# Altium PCB TK532_Kondensatorkort.PcbDoc
Units mm, origin at the board's own origin, x right, y up, seen from the top; angles counter-clockwise.
Board outline 80.3 x 75 mm, 2 copper layers (Top Layer, Bottom Layer); 5 components, 6 nets, 52 pads, 52 vias.
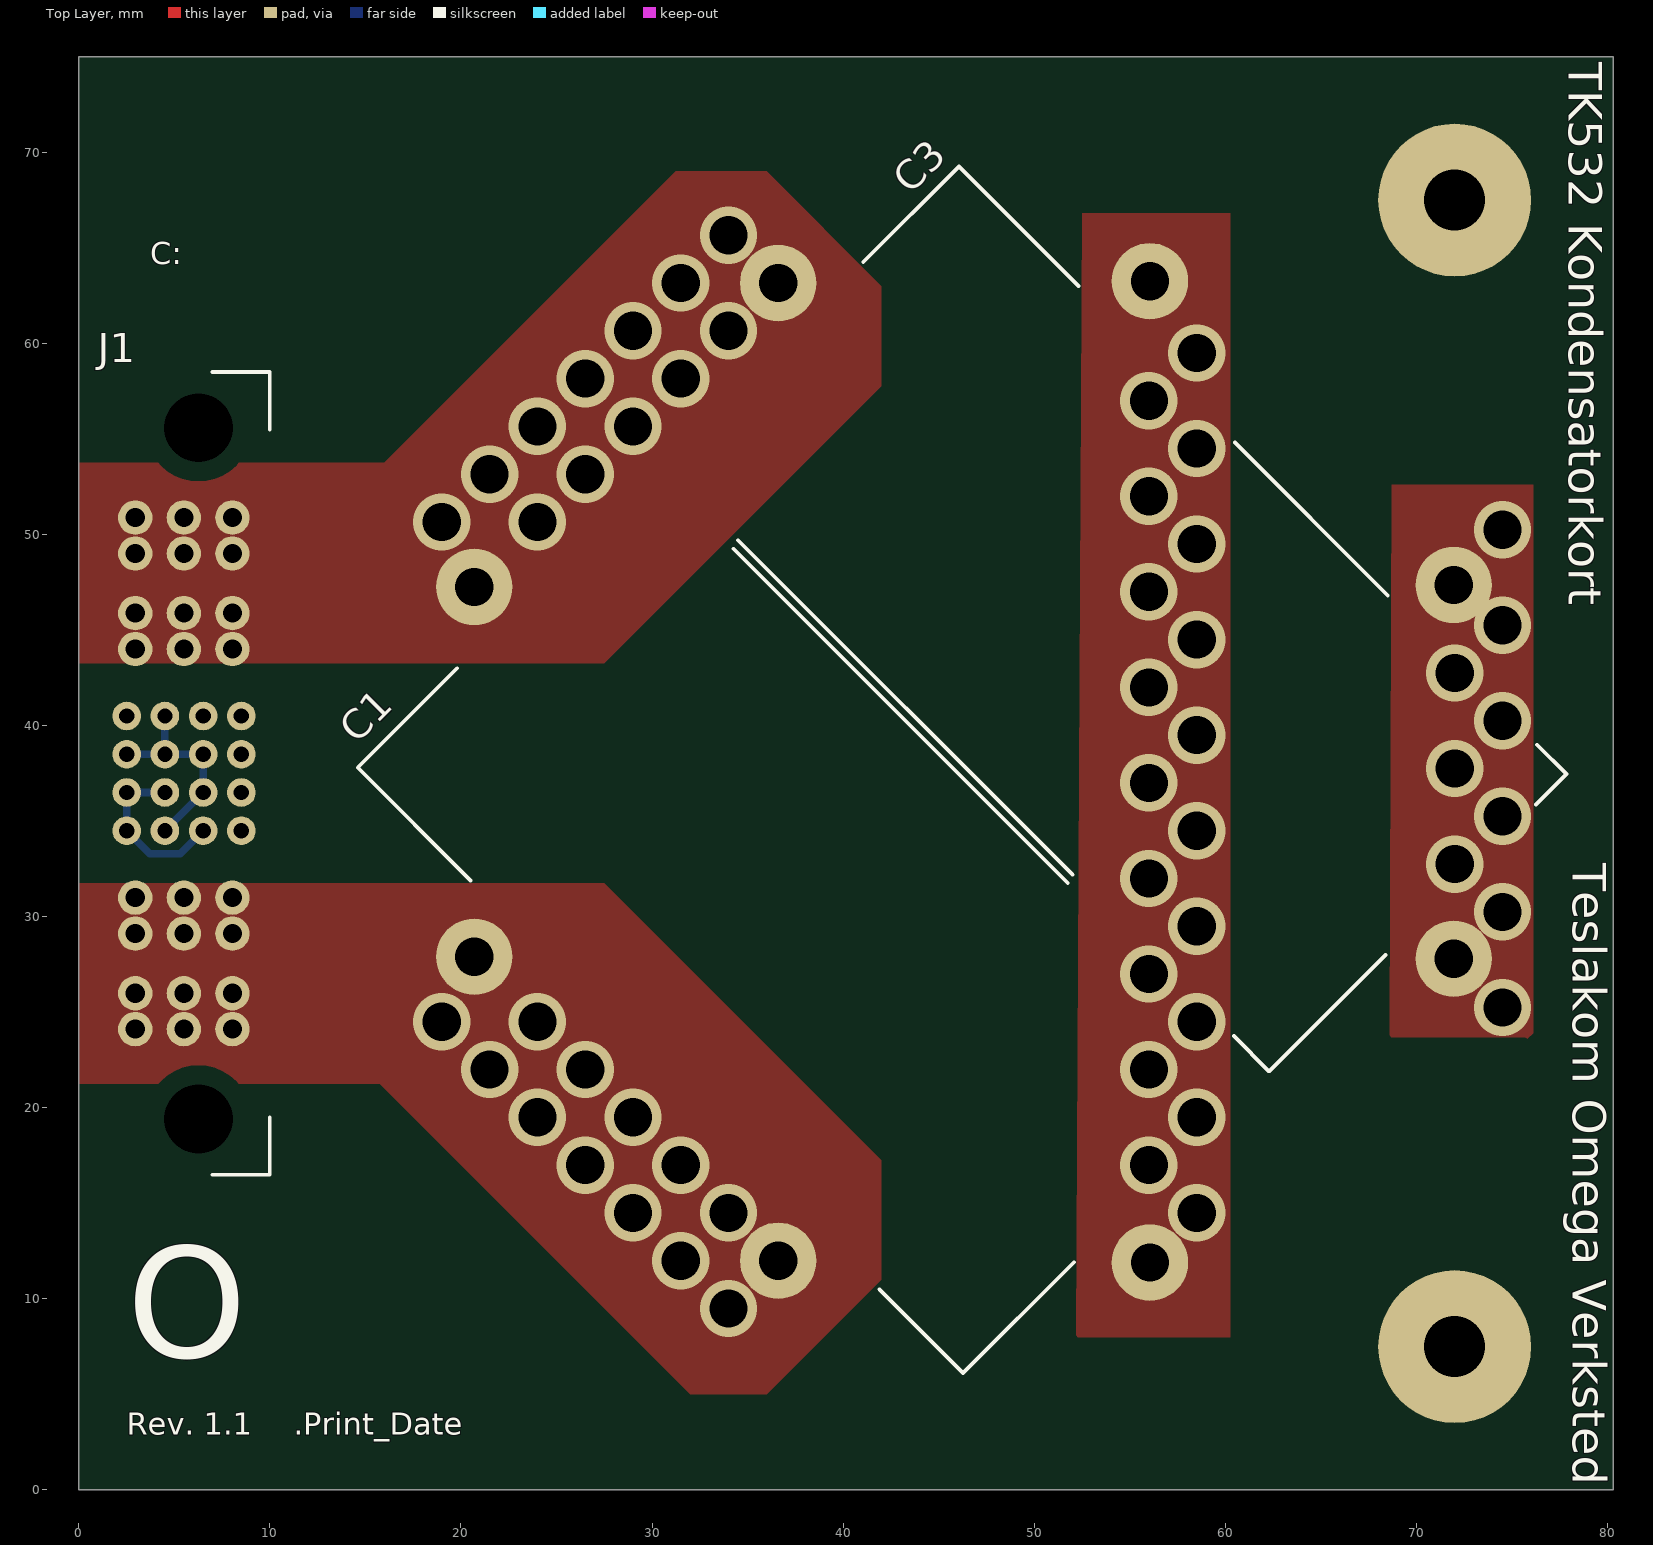
[diagram p0: Top Layer view]
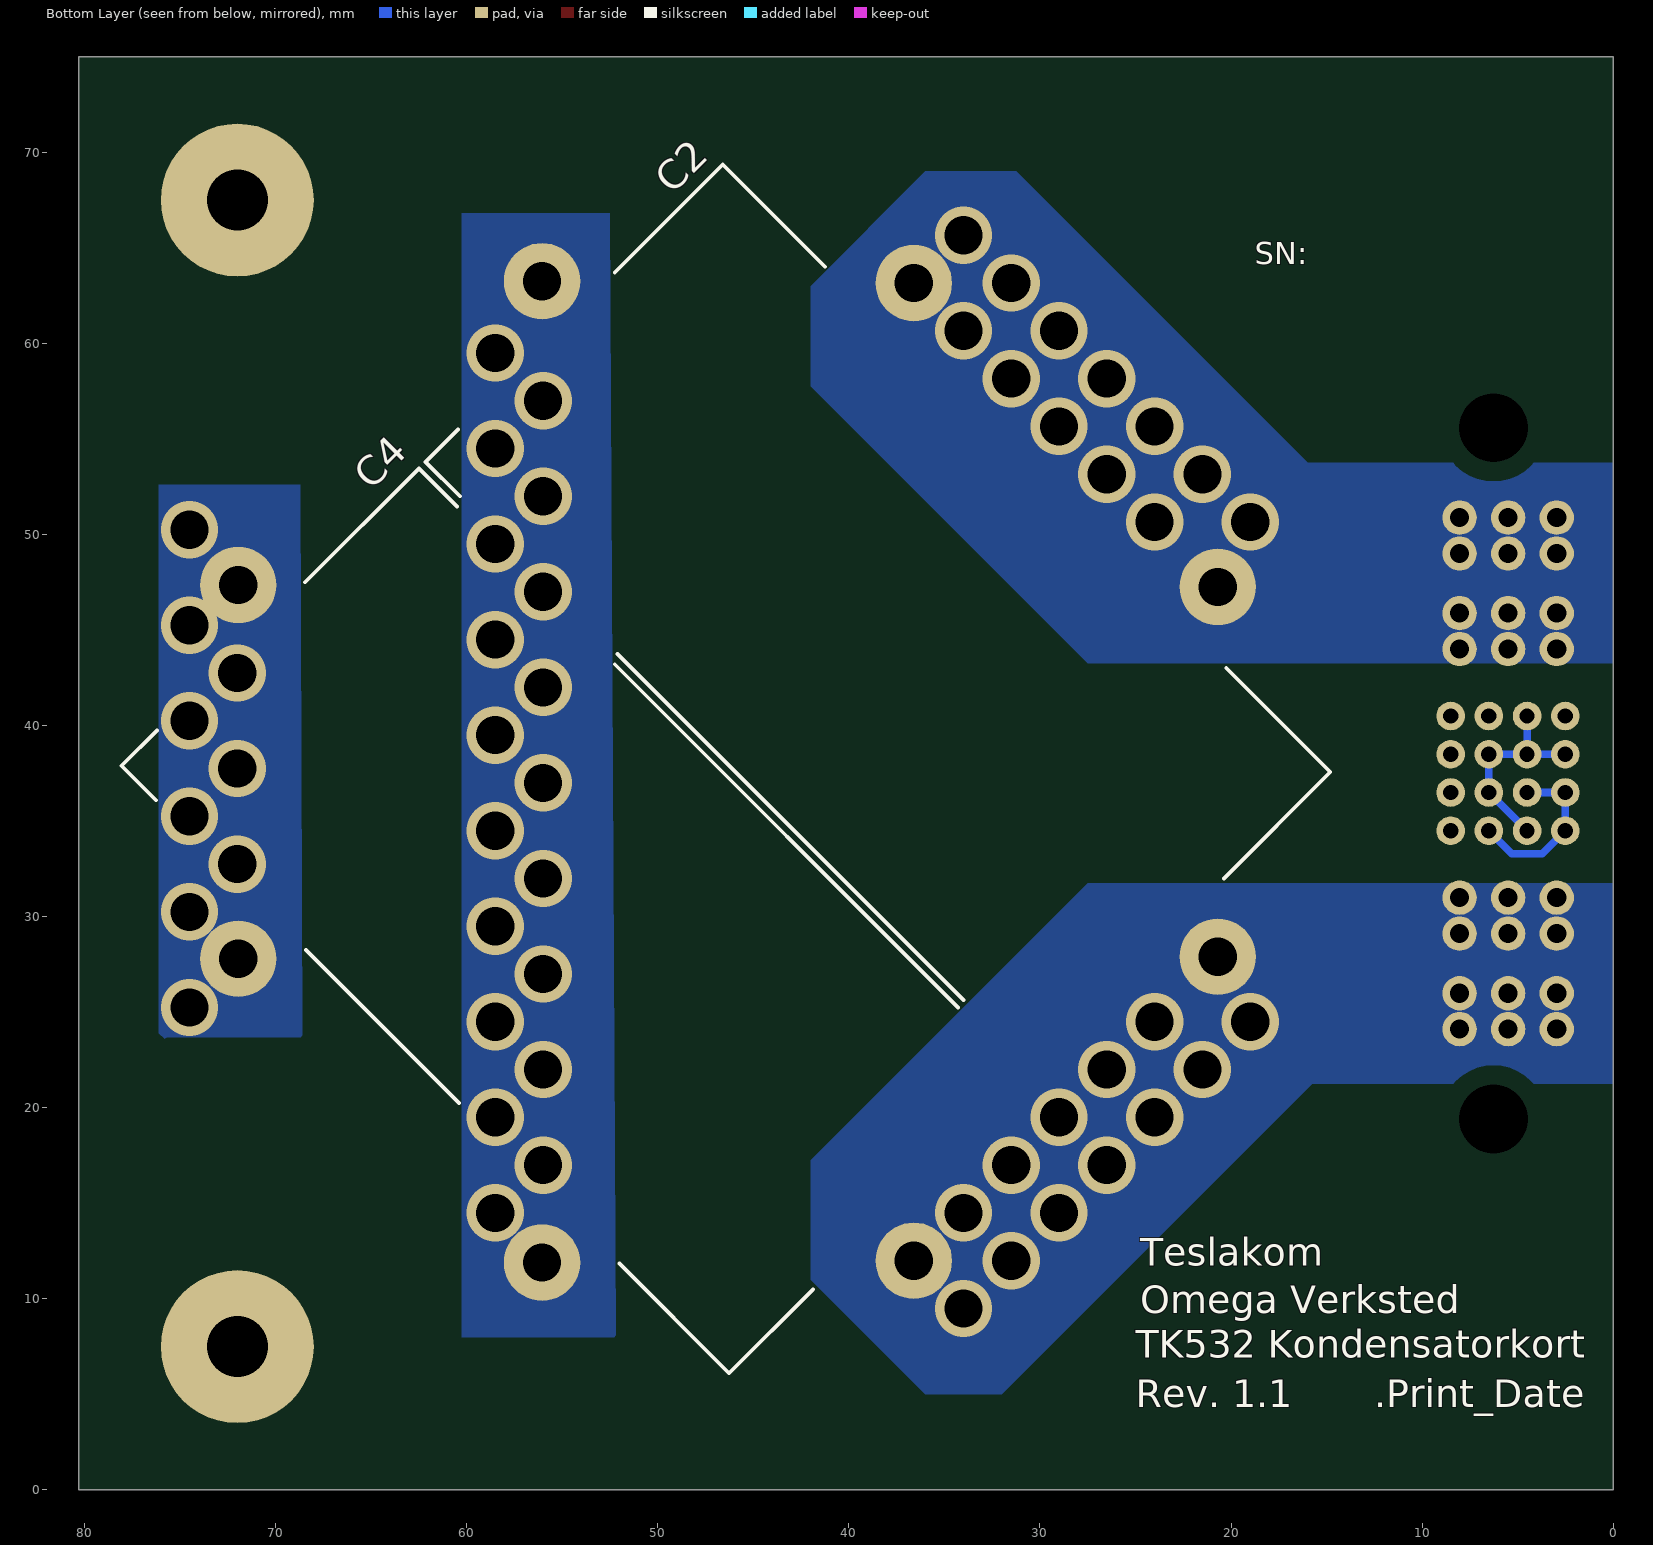
[diagram p1: Bottom Layer view, seen from below]

## Layer stack, top to bottom
Top Solder: solder mask 0.0102, Solder Resist, Dk 3.5
Top Layer: signal copper 0.0356
Dielectric 1: dielectric 0.32, FR-4, Dk 4.8
Bottom Layer: signal copper 0.0356
Bottom Solder: solder mask 0.0102, Solder Resist, Dk 3.5

## Board outline
0,0 0,75 80.3,75 80.3,0

## Design rules (kind name [scope] priority, off if disabled: settings)
Clearance [All] p1: gap=0.5 ignorepadtopadclearanceinfootprint=FALSE except(0: Arc-Text Arc-Hole Track-Text Track-Hole SMDPad-Text SMDPad-Hole THPad-Text THPad-Hole Via-Text Via-Hole Fill-Text Fill-Hole Poly-Text Poly-Hole Region-Text Region-Hole Text-Text Text-Hole; 0.2: Track-Track Track-SMDPad Track-THPad Track-Via Track-Fill; 1: Arc-Poly Track-Poly SMDPad-Poly THPad-Poly Via-Poly Fill-Fill Fill-Poly Fill-Region Poly-Poly Poly-Region)
HoleSize [All] p1: absolutevalues=TRUE maxlimit=10 minlimit=0.025 maxpercent=80.000 minpercent=20.000
PlaneConnect [All] p1: planeconnectstyle=Relief reliefexpansion=0.508 reliefentries=4 reliefconductorwidth=0.4 reliefairgap=0.254
PolygonConnect [All] p1: connectstyle=Direct reliefconductorwidth=0.6 reliefentries=4 polygonreliefangle="90 Angle" airgapwidth=0.1
RoutingVias [All] p1: holewidth=0.3 width=0.6 viastyle="Through Hole" minholewidth=0.3 minwidth=0.1 maxholewidth=10 maxwidth=10
ShortCircuit ShortCircuit_1 [InPolygon vs IsText] p1: allowed=TRUE
ShortCircuit [All] p2: allowed=FALSE
SolderMaskExpansion [All] p1: expansion=0.102 istentingtop=FALSE
Width [All] p1: maxlimit=10 minlimit=0.4 preferedwidth=1
27 further rules are at their usual default settings.

## Components (designator, comment, footprint, x,y, rotation, side; value= is the part's Value field where it differs from the comment)
C1 "100nF" CAPAR11L45 56.055,11.9 r135 top locked
C2 "100nF" CAPAR11L45 20.7,27.9 r45 bottom locked
C3 "100nF" CAPAR11L45 71.955,27.8 r135 top locked
C4 "100nF" CAPAR11L45 36.6,12 r45 bottom locked
J1 "MPXX-02-16-02" MPTC-02-16-02-01-03-L-RA-SD 5.5,37.5 r180 top

## Footprints (in the part's own frame and the unit in brackets; to place one, negate y for a bottom-side part, rotate by r counter-clockwise, add the part's x,y. Pads: shape width x height; smd on the part's side, far side on the other; paste and mask are expansions set on the pad)
CAPAR11L45 [mm] "942C20P1K-F 0.1uF 2kV polypropylene film capacitor"
  round 4 hole 2: 1(0,0) 2(50,0)
  silkscreen extent 2.83,-11 41.83,11, body extent 2.01,-12.24 48.01,12.24, height 25.25
MPTC-02-16-02-01-03-L-RA-SD [mm] "SAMTEC"
  round 0 hole 3.6 unplated mask+1: 0(-0.77,18.085) 0(-0.77,-18.085)
  round 1.8 hole 1: 1(-2.54,-11.505) 1(-2.54,-13.385) 1(0,-11.505) 1(0,-13.385) 1(2.54,-11.505) 1(2.54,-13.385) 2(-2.54,-6.505) 2(-2.54,-8.385) 2(0,-6.505) 2(0,-8.385) 2(2.54,-6.505) 2(2.54,-8.385) 3(-2.54,8.385) 3(-2.54,6.505) 3(0,8.385) 3(0,6.505) 3(2.54,8.385) 3(2.54,6.505) 4(-2.54,13.385) 4(-2.54,11.505) 4(0,13.385) 4(0,11.505) 4(2.54,13.385) 4(2.54,11.505)
  round 1.5 hole 0.8: 5(2.99,-3) 6(2.99,-1) 7(2.99,1) 8(2.99,3) 9(0.99,-3) 10(0.99,-1) 11(0.99,1) 12(0.99,3) 13(-1.01,-3) 14(-1.01,-1) 15(-1.01,1) 16(-1.01,3) 17(-3.01,-3) 18(-3.01,-1) 19(-3.01,1) 20(-3.01,3)
  silkscreen extent -4.5,-21 -1.5,21, body extent -4.2,-20.63 11.5,20.63, height 10.82

## Part data
C1 C2 C3 C4: library part 4153, "2kV(kanskje) polypropylene film capacitor, D22, L50", antall=25, dybde=2, hylle=4, id=4153, komponenttype=2, lager_type=Fremlager, leverandor=Farnell, leverandor_varenr=2347676, navn=100nF, nokkelord="capacitor, kondis, tesla", pakke_opprettet="19/08/2017 15:47:34", pakke_opprettet_av=1154, pakketype=TH, pris=10, produsent="Cornell Dubilier", rad=12, rom=OV, symbol_opprettet="14/11/2014 20:19:34", symbol_opprettet_av=815
J1: library part 3221, "SAMTEC Connector", id=3221, komponenttype=11, leverandor=Mouser, leverandor_varenr=MPTC-02-16-02-01-03-L-RA-SD, navn=MPTC-02-16-02-01-03-L-RA-SD, nokkelord="Kan kjøpes rett fra SAMTEC", pakke_opprettet="13/07/2014 16:35:56", pakke_opprettet_av=815, pakketype=TH, pris=30, produsent=SAMTEC, symbol_opprettet="13/07/2014 16:35:21", symbol_opprettet_av=815

## Free pads (board coordinates)
  round 8 hole 3.2 unplated: 0(72,7.5) 0(72,67.5)

## Via types
v1: diameter 3, hole 2, Top Layer to Bottom Layer, tented both sides, 52 vias

## Nets (pads, with @x,y where several pads share a name; then routed paths per layer and width w, separated by ;. In a path a pad name is that pad's centre, name@x,y a point inside that pad or via, vN(x,y) a via of type N, cw(c..) or ccw(c..) an arc to the next point about the centre after c; other vN are vias at no path point)
C1-C2: C1.1 C2.2
  other v1: 58.5,14.5 56,17 58.5,19.5 56,22 58.5,24.5 56,27 58.5,29.5 56,32 58.5,34.5 56,37 58.5,39.5 56,42 58.5,44.5 56,47 58.5,49.5 56,52 58.5,54.5 56,57 58.5,59.5
C3-C4: C3.1 C4.2
  other v1: 74.5,25.25 74.5,30.25 72,32.75 74.5,35.25 72,37.75 74.5,40.25 72,42.75 74.5,45.25 74.5,50.25
GND: J1.7 J1.8 J1.11 J1.16 | length 9
  Bottom Layer w0.4: J1.11 J1.7 J1.8 3.71,33.3 5.31,33.3 J1.16
KONDIS_INN: C1.2 C3.2 J1.1 J1.2
  other v1: 19,50.655 24,50.655 21.5,53.155 26.5,53.155 24,55.655 29,55.655 26.5,58.155 31.5,58.155 29,60.655 34,60.655 31.5,63.155 34,65.655
KONDIS_UT: C2.1 C4.1 J1.3 J1.4
  other v1: 34,9.5 31.5,12 29,14.5 34,14.5 26.5,17 31.5,17 24,19.5 29,19.5 21.5,22 26.5,22 19,24.5 24,24.5
VCC_P5V0: J1.6 J1.9 J1.10 J1.12 J1.14 J1.15 | length 10.8
  Bottom Layer w0.4: J1.6 J1.10 ; J1.12 J1.15 J1.14 J1.10 ; J1.9 J1.10
pads on no net: J1.0 J1.5 J1.13 J1.17 J1.18 J1.19 J1.20

## Polygon pours and split planes (outlines as drawn)
C1-C2 on Bottom Layer "C1-C2_L02_P019" (solid, pour order 19): 52.5,66.8 60.25,66.8 60.25,8 52.2,8
KONDIS_UT on Bottom Layer "KONDIS_UT_L02_P017" (solid, pour order 17): 0,31.75 27.5,31.75 42,17.25 42,11 36,5 32,5 15.75,21.25 0,21.25
KONDIS_INN on Bottom Layer "KONDIS_INN_L02_P016" (solid, pour order 16): 0,43.25 27.5,43.25 42,57.75 42,63 36,69 31.25,69 16,53.75 0,53.75
C3-C4 on Bottom Layer "C3-C4_L02_P015" (solid, pour order 15): 68.7,52.6 76.1,52.6 76.1,23.9 75.8,23.6 75.7,23.7 68.6,23.7
no net on Bottom Solder "C1-C2_L02_P010" (solid): 52.5,66.8 60.25,66.8 60.25,8 52.2,8
no net on Bottom Solder "KONDIS_INN_L02_P016" (solid, pour order 25): 0,43.25 27.5,43.25 42,57.75 42,63 36,69 31.25,69 16,53.75 0,53.75
no net on Bottom Solder "C1-C2_L02_P019" (solid, pour order 29): 52.5,66.8 60.25,66.8 60.25,8 52.2,8
no net on Bottom Solder "C3-C4_L02_P015" (solid, pour order 31): 68.7,52.6 76.1,52.6 76.1,23.9 75.8,23.6 75.7,23.7 68.6,23.7
no net on Bottom Solder "KONDIS_UT_L02_P017" (solid, pour order 35): 0,31.75 27.5,31.75 42,17.25 42,11 36,5 32,5 15.75,21.25 0,21.25
KONDIS_INN on Top Layer "KONDIS_INN_L01_P023" (solid, pour order 23): 0,43.25 27.5,43.25 42,57.75 42,63 36,69 31.25,69 16,53.75 0,53.75
KONDIS_UT on Top Layer "KONDIS_UT_L01_P026" (solid, pour order 26): 0,31.75 27.5,31.75 42,17.25 42,11 36,5 32,5 15.75,21.25 0,21.25
C1-C2 on Top Layer "C1-C2_L01_P027" (solid, pour order 27): 52.5,66.8 60.25,66.8 60.25,8 52.2,8
C3-C4 on Top Layer "C3-C4_L01_P034" (solid, pour order 34): 68.7,52.6 76.1,52.6 76.1,23.9 75.8,23.6 75.7,23.7 68.6,23.7
no net on Top Solder "KONDIS_INN_L02_P016" (solid, pour order 24): 0,43.25 27.5,43.25 42,57.75 42,63 36,69 31.25,69 16,53.75 0,53.75
C1-C2 on Top Solder "C1-C2_L02_P019" (solid, pour order 28): 52.5,66.8 60.25,66.8 60.25,8 52.2,8
no net on Top Solder "KONDIS_UT_L02_P017" (solid, pour order 32): 0,31.75 27.5,31.75 42,17.25 42,11 36,5 32,5 15.75,21.25 0,21.25
no net on Top Solder "C3-C4_L02_P015" (solid, pour order 30): 68.7,52.6 76.1,52.6 76.1,23.9 75.8,23.6 75.7,23.7 68.6,23.7

## Silkscreen, mask and mechanical layers (free items; w line width, h text height)
Top Overlay:
  lines w0.1: 46.278,6.121 52.076,11.919
  lines w0.2: 19.803,43 14.601,37.798 20.5,31.899 ; 34.5,49.699 52,32.199 ; 41.053,64.25 46.058,69.254 52.312,63 ; 41.899,10.5 46.278,6.121 ; 60.449,23.75 62.291,21.908 68.384,28 ; 60.5,54.812 68.5,46.812 ; 76.25,35.866 77.848,37.464 76.312,39
  text "TK532 Kondensatorkort" at 77.4,74.7 h3 r270
  text "C:" at 3.75,63.75 h2
  text "Teslakom Omega Verksted" at 77.6,32.8 h3 r270
  text "O" at 2.5,5 h10
  text "Rev. 1.1" at 2.51,2.5 h2
  text ".Print_Date" at 11.25,2.5 h2
Bottom Overlay:
  lines w0.2: 20.25,43.006 14.808,37.564 20.372,32 ; 34,25.644 52.106,43.75 ; 34.294,25.25 52.25,43.206 ; 41.25,64.006 46.598,69.354 52.25,63.702 ; 41.872,10.5 46.264,6.108 52,11.844 ; 60.356,52 62.154,53.798 60.452,55.5 ; 60.406,20.25 68.406,28.25 ; 60.5,51.456 62.498,53.454 68.452,47.5 ; 76.202,39.75 78.054,37.898 76.25,36.094
  text "SN:" at 18.75,63.75 h2
  text "Teslakom / Omega Verksted" at 24.75,8.75 h2.5
  text "TK532 Kondensatorkort" at 25,6.428 h2.5
  text ".Print_Date" at 12.5,3.836 h2.5
  text "Rev. 1.1" at 25,3.836 h2.5
Mechanical 1:
  lines w0.2: 0,0 0,75 80,75 80,0 0,0